# Altium PCB SSRT Tronics.PcbDoc
Units mm, origin at the board's own origin, x right, y up, seen from the top; angles counter-clockwise.
Board outline 69.85 x 55.63 mm, 2 copper layers (Top Layer, Bottom Layer); 11 components, 13 nets, 60 pads, 1 vias.
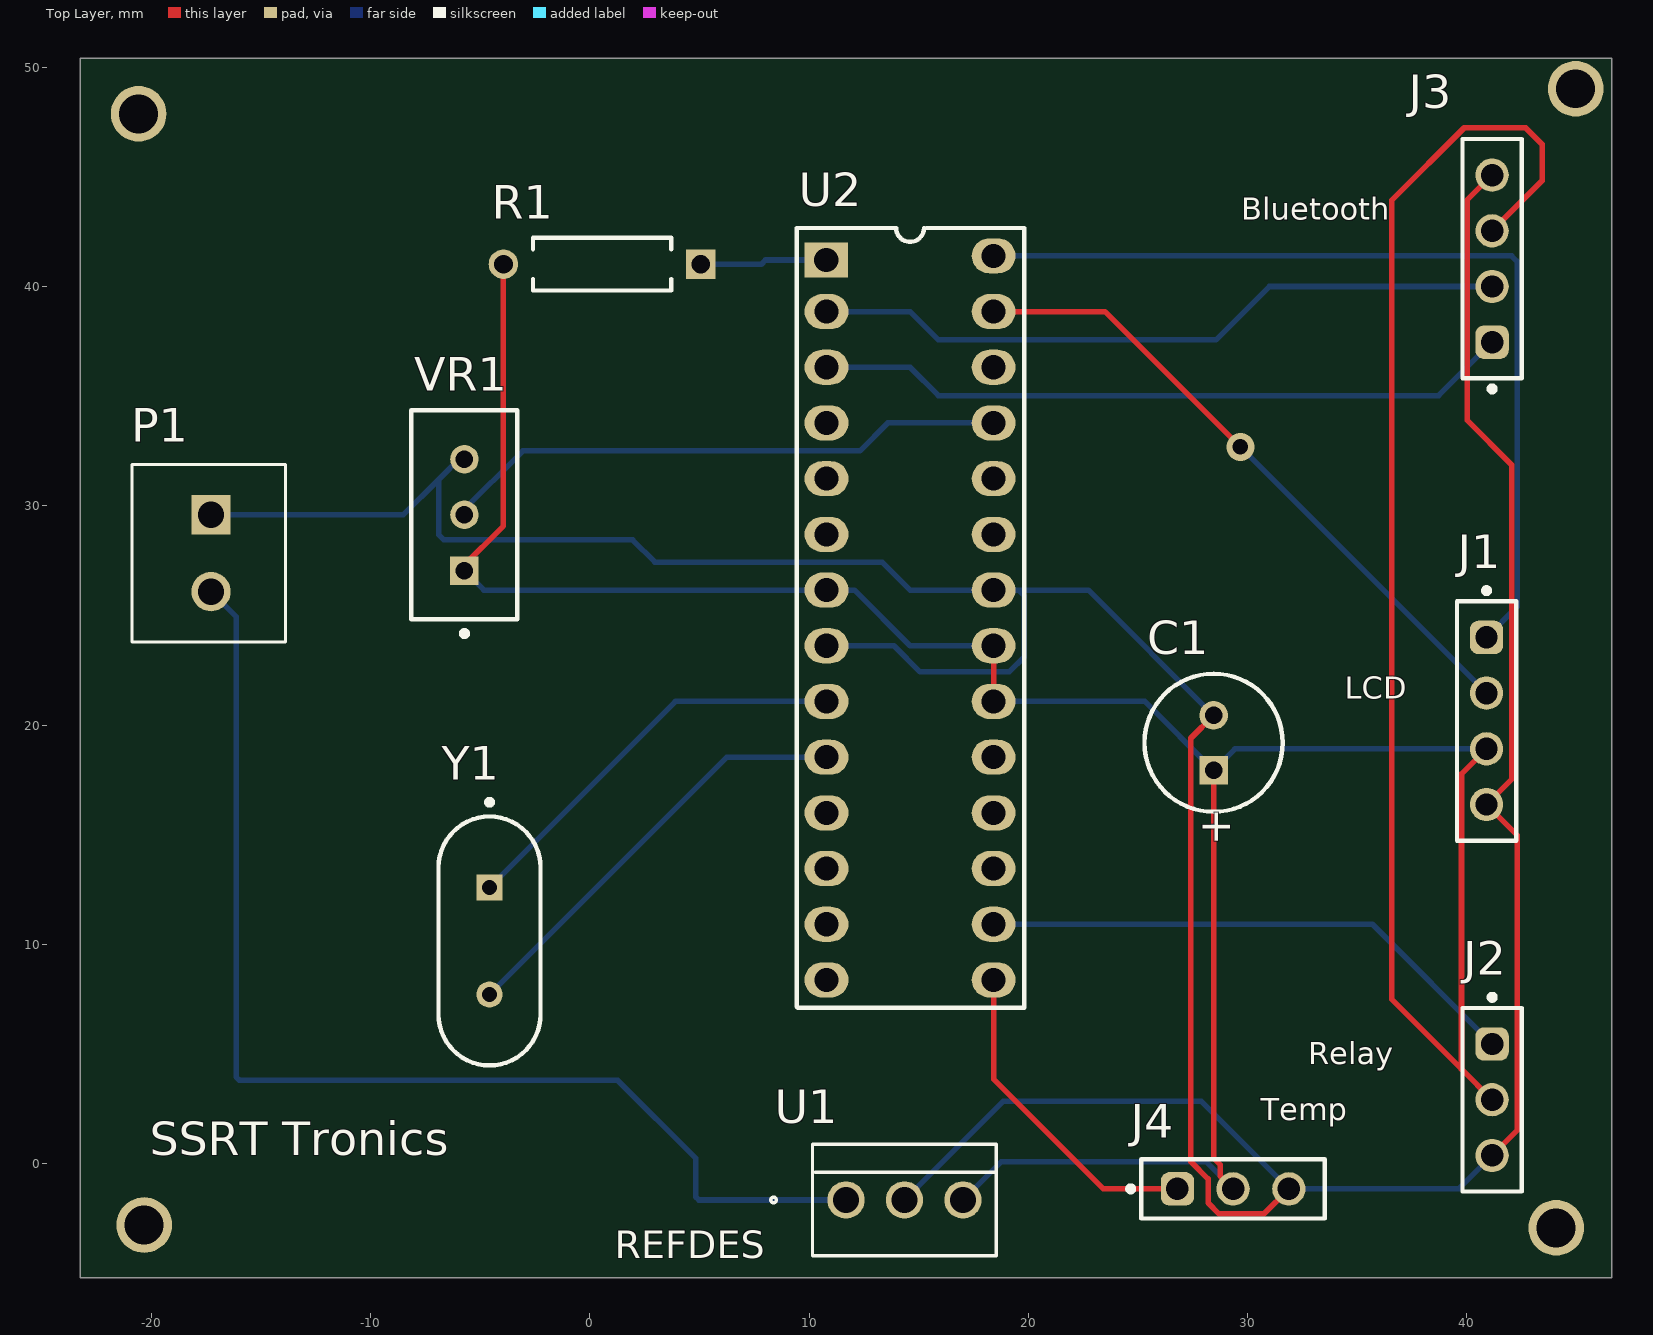
[diagram p0: Top Layer view]
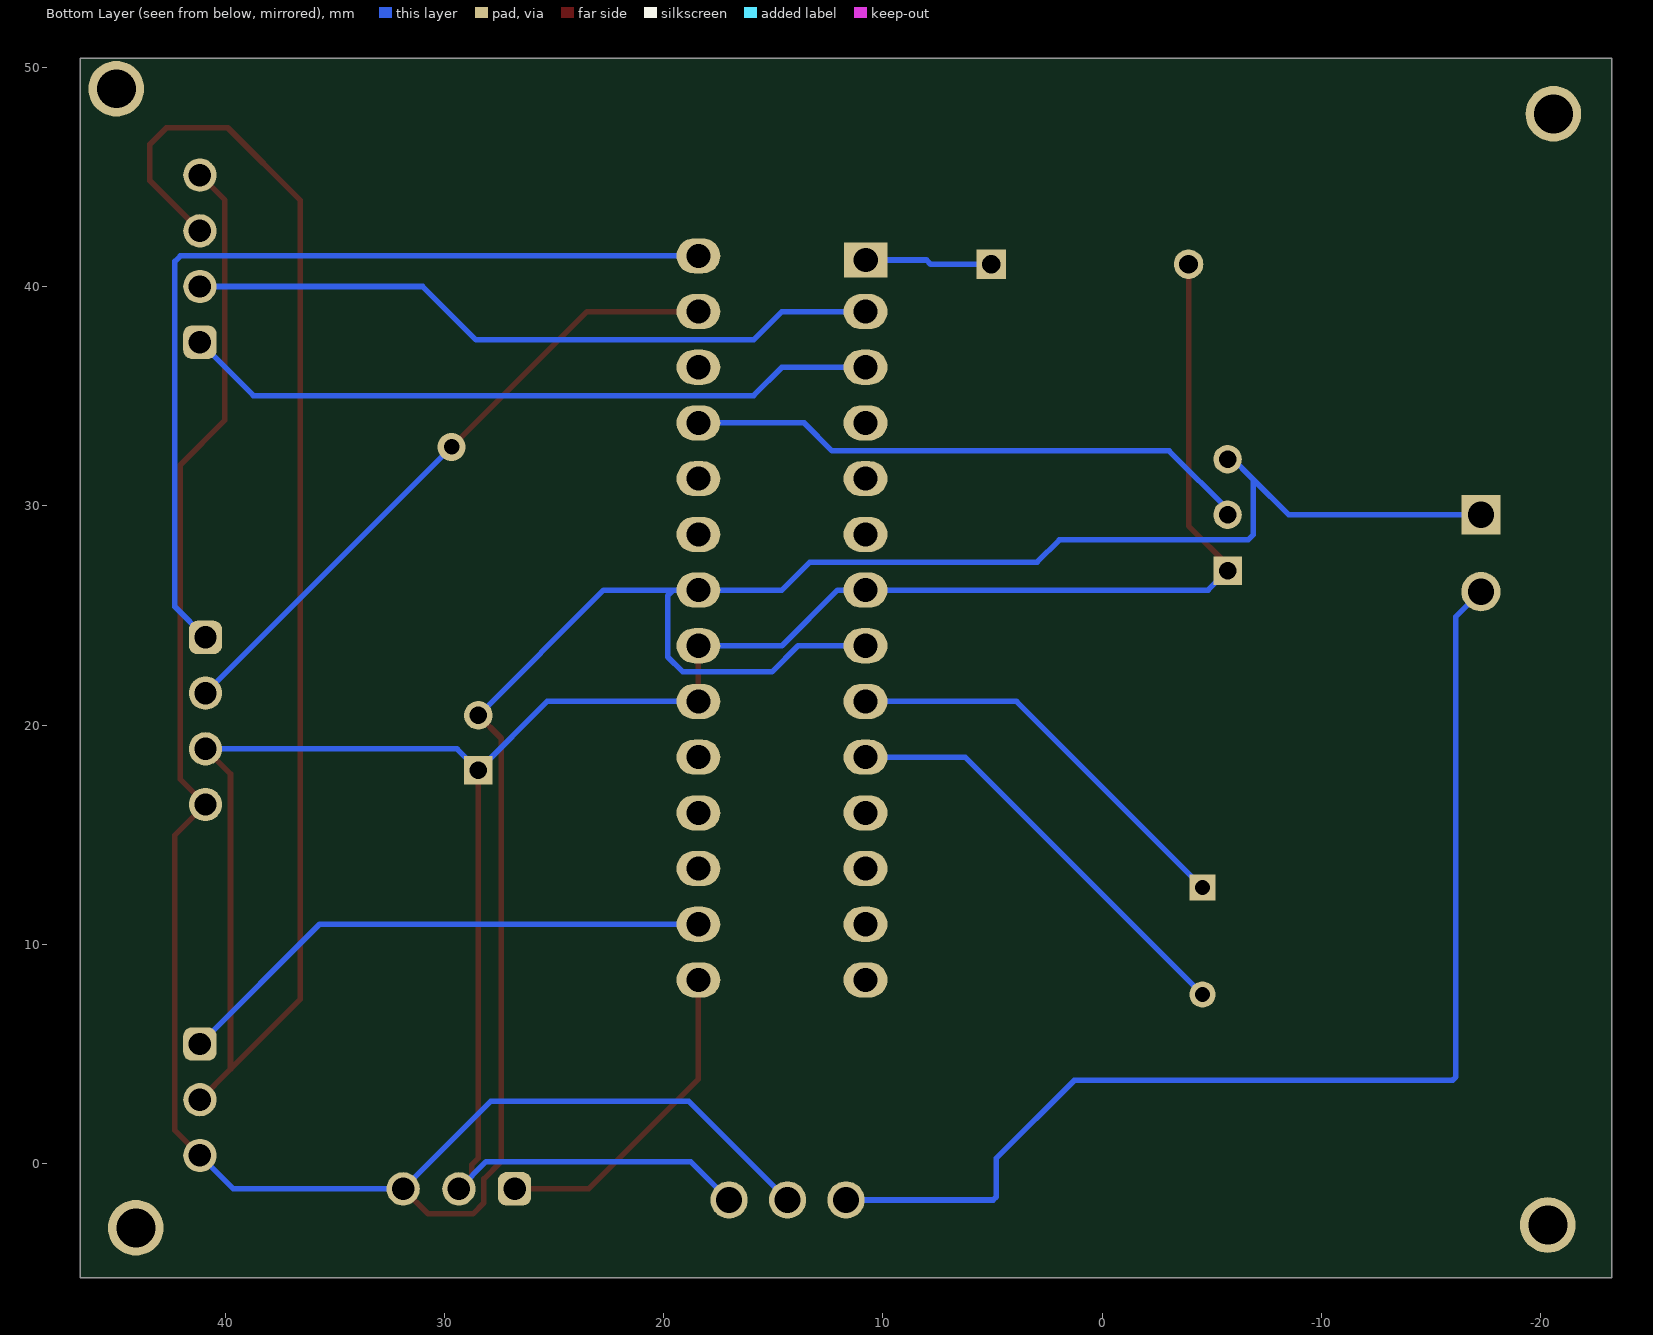
[diagram p1: Bottom Layer view, seen from below]
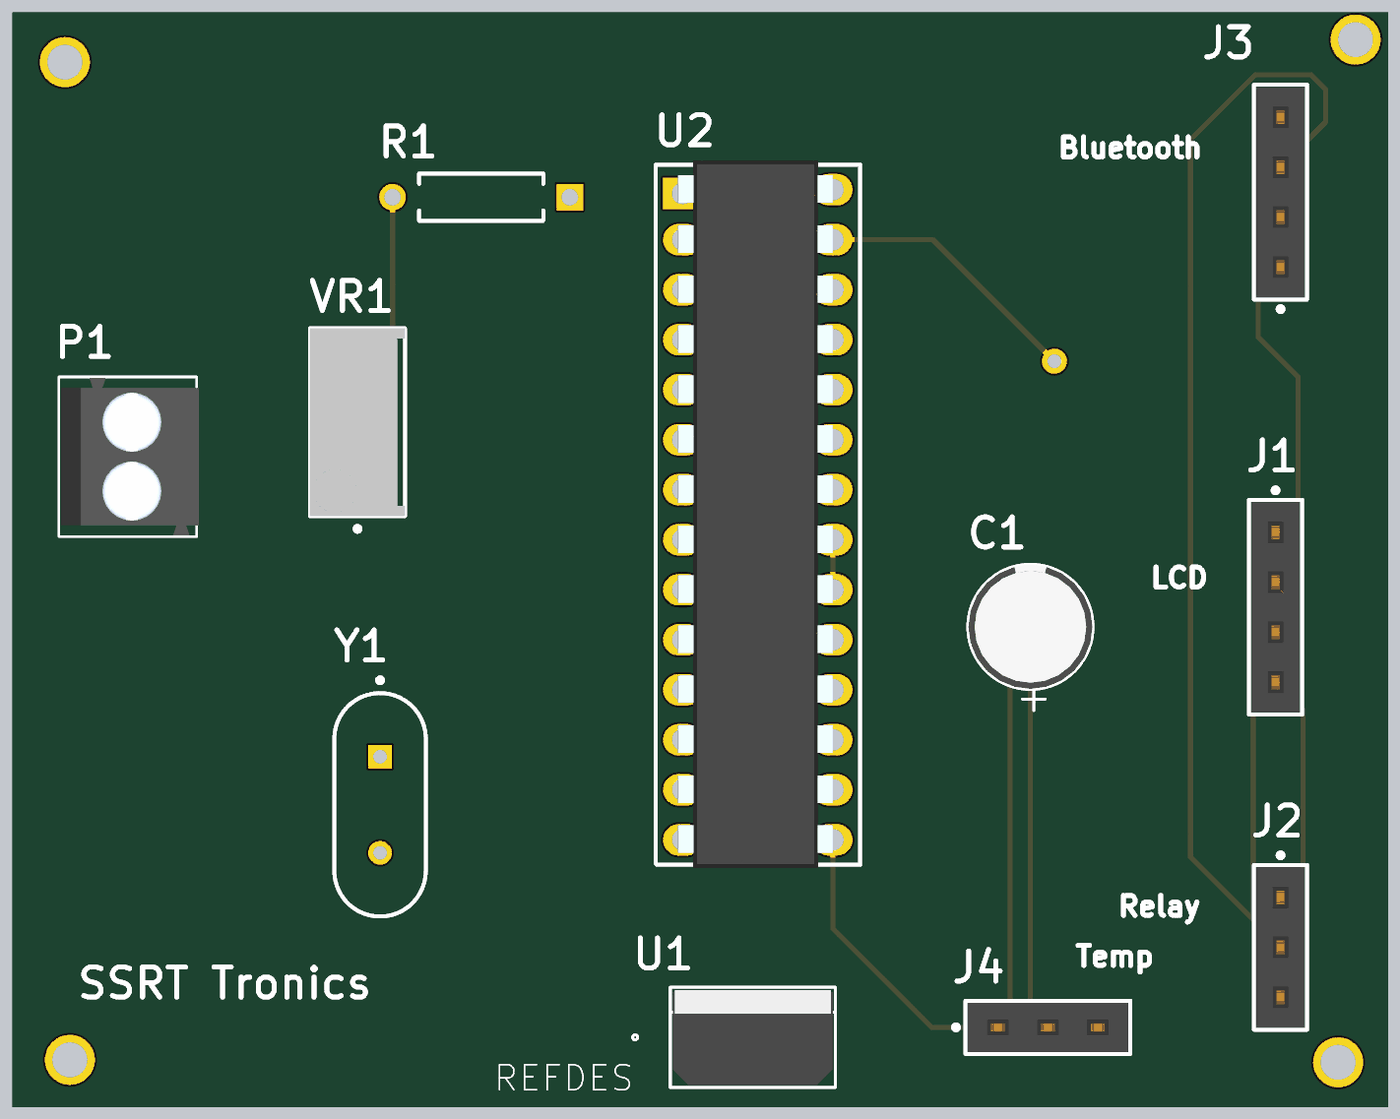
[diagram p2: 3D render of the assembled board from above, using the file's embedded part models]

## Layer stack, top to bottom
Top Solder: solder mask 0.0102, Solder Resist, Dk 3.5
Top Layer: signal copper 0.0356
Dielectric 1: dielectric 0.32, FR-4, Dk 4.8
Bottom Layer: signal copper 0.0356
Bottom Solder: solder mask 0.0102, Solder Resist, Dk 3.5

## Board outline
-23.241,-5.207 46.609,-5.207 46.609,50.419 -23.241,50.419

## Design rules (kind name [scope] priority, off if disabled: settings)
Clearance [All] p1: gap=0.254 ignorepadtopadclearanceinfootprint=FALSE
PolygonConnect [All] p1: connectstyle=Relief reliefconductorwidth=0.254 reliefentries=4 polygonreliefangle="90 Angle" airgapwidth=0.254
RoutingVias [All] p1: holewidth=0.711 width=1.27 viastyle="Through Hole" minholewidth=0.711 minwidth=1.27 maxholewidth=0.711 maxwidth=1.27
SolderMaskExpansion [All] p1: expansion=0.102 istentingtop=FALSE
SupplyNets "Schematic Supply Nets_2" [InNet('+5')] p1: voltage=0.000
SupplyNets "Schematic Supply Nets_1" [InNet('VCC')] p2: voltage=0.000
SupplyNets "Schematic Supply Nets" [InNet('GND')] p3: voltage=0.000
Width [All] p1: maxlimit=0.254 minlimit=0.254 preferedwidth=0.254
30 further rules are at their usual default settings.

## Components (designator, comment, footprint, x,y, rotation, side; value= is the part's Value field where it differs from the comment)
C1 "ECA-1HM470" CAPPR55-250-1120X630X1220 28.448,19.197 r90 top value=47µF
J1 "61300411821" 61300411821 40.894,20.193 r270 top
J2 "61300311821" 61300311821 41.148,2.921 r270 top
J3 "61300411821" 61300411821 41.148,41.275 r90 top
J4 "61300311821" 61300311821 29.337,-1.143 r0 top
P1 "OSTTE020104" OST_OSTTE020104 -17.272,27.841 r270 top
R1 "MFR-25FBF52-10K" RESA60-630X240 0.563,41.021 r180 top value=10k
U1 "LM7805CTNOPB" NDE3_TEX 11.684,-1.651 r0 top
U2 "ATMEGA328P-PU" 27_DIP_7.62mm 10.785,41.212 r0 top
VR1 "3296W-1-103LF" BOUR-3296W -5.715,29.591 r90 top
Y1 "FOXSLF/160-20" FOX-FOXSLF160-20 -4.572,10.16 r270 top

## Footprints (in the part's own frame and the unit in brackets; to place one, negate y for a bottom-side part, rotate by r counter-clockwise, add the part's x,y. Pads: shape width x height; smd on the part's side, far side on the other; paste and mask are expansions set on the pad)
27_DIP_7.62mm [mm]
  rect 2x1.6 hole 1.1: 1(0,0)
  oval 2x1.6 hole 1.1: 2(0.01,-2.35) 3(0.01,-4.89) 4(0.01,-7.43) 5(0.01,-9.97) 6(0.01,-12.51) 7(0.01,-15.05) 8(0.01,-17.59) 9(0.01,-20.13) 10(0.01,-22.67) 11(0.01,-25.21) 12(0.01,-27.75) 13(0.01,-30.29) 14(0.01,-32.83) 15(7.63,-32.83) 16(7.63,-30.29) 17(7.63,-27.75) 18(7.63,-25.21) 19(7.63,-22.67) 20(7.63,-20.13) 21(7.63,-17.59) 22(7.63,-15.05) 23(7.63,-12.51) 24(7.63,-9.97) 25(7.63,-7.43) 26(7.63,-4.89) 27(7.63,-2.35) 28(7.63,0.19)
  silkscreen extent -1.35,-34.1 9.02,1.46, body extent -0.23,-34.26 7.65,1.68, height 4.65
61300311821 [mm] "Socket Header, Pitch 2.54 mm, THT, Vertical, single row, 3p"
  rrect50% 1.52x1.52 hole 1.02: 1(-2.54,0)
  round 1.52 hole 1.02: 2(0,0) 3(2.54,0)
  silkscreen extent -4.79,-1.35 4.19,1.35, body extent -4.06,-1.25 4.06,1.25, height 8.55
61300411821 [mm] "Socket Header, Pitch 2.54 mm, THT, Vertical, single row, 4p"
  rrect50% 1.52x1.52 hole 1.02: 1(-3.81,0)
  round 1.52 hole 1.02: 2(-1.27,0) 3(1.27,0) 4(3.81,0)
  silkscreen extent -6.06,-1.35 5.46,1.35, body extent -5.33,-1.25 5.33,1.25, height 8.55
BOUR-3296W [mm] "THD, 3-Leads, Body 9.53x4.83mm, Pitch 2.54mm"
  rect 1.3x1.3 hole 0.8: 1(-2.54,0)
  round 1.3 hole 0.8: 2(0,0) 3(2.54,0)
  silkscreen extent -5.54,-2.41 4.76,2.42, body extent -4.76,-2.4 4.76,2.42, height 11.55
CAPPR55-250-1120X630X1220 [mm] "THD, 2-Leads, Dia 6.3mm, Pin Spacing 2.5mm"
  rect 1.3x1.3 hole 0.8: 1(-1.25,0)
  round 1.3 hole 0.8: 2(1.25,0)
  silkscreen extent -3.15,-3.15 3.15,3.15, body extent -3.15,-3.15 3.16,3.15, height 12.21
FOX-FOXSLF160-20 [mm] "THD, 2-Leads, Body 11.35x4.65mm"
  rect 1.2x1.2 hole 0.7: 1(-2.44,0)
  round 1.2 hole 0.7: 2(2.44,0)
  silkscreen extent -6.45,-2.33 5.67,2.33, body extent -5.68,-2.33 5.68,2.33, height 3.6
NDE3_TEX [mil]
  round 67 / inner round 60 / far side round 67 hole 47 paste-99999 mask+0: 1(0,0) 2(105,0) 3(210,0)
  silkscreen extent -135,-100 270,100, body extent -55,-95 265,95, height 420
OST_OSTTE020104 [mm]
  rect 1.8x1.8 / inner round 1.8 / far side rect 1.8x1.8 hole 1.2: 1(-1.75,0)
  round 1.8 hole 1.2: 2(1.75,0)
  silkscreen extent -4.05,-3.6 4.05,3.4, body extent -4,-3.5 4,3.5, height 8.4
RESA60-630X240 [mm] "Axial Resistor, 2-Leads, Dia 2.4mm, Body Length 6.3mm"
  rect 1.35x1.35 hole 0.85: 1(-4.5,0)
  round 1.35 hole 0.85: 2(4.5,0)
  silkscreen extent -3.15,-1.2 3.15,1.2, body extent -4.77,-1.19 4.77,1.2, height 2.4

## Part data
C1: library part CMP-001-00031-7, "Aluminum Electrolytic Capacitor, 47 uF, +/-20%, 50 V, -40 to 85 degC, 2-Pin THD, RoHS, Bulk", Capacitor Type=Electrolytic, Case/Package=Radial, Manufacturer=Panasonic, Max Operating Temperature=85°C, Min Operating Temperature=-40°C, Package Description="2-Pin Radial Lead, Dia 6.3 mm, Height 12.2 mm", Package Quantity=200, Package Reference=CAPPR55-250-1120X630X1220, Ripple Current=130mA, Tolerance=20%, Voltage Rating=50V, Datasheet URL=https://industrial.panasonic.com/cdbs/www-data/pdf/RDF0000/DMF0000COL72.pdf, Datasheet Version=Apr-16, Diameter=6.3mm, Lead Pitch=2.5mm, Manufacturer URL=http://www.panasonic.com/, Mounting Technology=TH, Packaging=Bulk, Pins=2, Ripple Current (AC)=130mA, RoHS Compliant=True
J1 J3: "WR-PHD Socket Header, THT, Vertical, pitch 2.54mm, 1 Row, 4P", Contact Resistance=20mOhm, Manufacturer="Wurth Elektronik", Operating Temperature Max=125°C, Operating Temperature Min=-40°C, Rated Current=3A, Withstanding Voltage=500V, Working Voltage=250V, Category="Board-to-Board Connectors", ComponentLink1Description="Website Link", ComponentLink1URL=https://www.we-online.com/redexpert/article/61300411821?ad, ComponentLink2Description="Datasheet Link", ComponentLink2URL=https://www.we-online.com/redexpert/spec/61300411821?ad, Gender="Socket Header", Manufacturer Part Number=61300411821, Match Code=WR-PHD, Mount="Through Hole", Number of Pins=4, Number of Rows=1, Orientation=Vertical, Packaging=Tray, Pitch=2.54mm
J2 J4: "WR-PHD Socket Header, THT, Vertical, pitch 2.54mm, 1 Row, 3P", Contact Resistance=20mOhm, Manufacturer="Wurth Elektronik", Operating Temperature Max=125°C, Operating Temperature Min=-40°C, Rated Current=3A, Withstanding Voltage=500V, Working Voltage=250V, Category="Board-to-Board Connectors", ComponentLink1Description="Website Link", ComponentLink1URL=https://www.we-online.com/redexpert/article/61300311821?ad, ComponentLink2Description="Datasheet Link", ComponentLink2URL=https://www.we-online.com/redexpert/spec/61300311821?ad, Gender="Socket Header", Manufacturer Part Number=61300311821, Match Code=WR-PHD, Mount="Through Hole", Number of Pins=3, Number of Rows=1, Orientation=Vertical, Packaging=Tray, Pitch=2.54mm
P1: "2 Position Wire to Board Terminal Block Horizontal with Board 0.138 (3.50mm) Through Hole", Package=None, Check_prices=https://www.snapeda.com/parts/OSTTE020104/ON/view-part/?ref=eda, MF="On Shore", MP=OSTTE020104, SnapEDA_Link=https://www.snapeda.com/parts/OSTTE020104/ON/view-part/?ref=snap
R1: library part CMP-009-00047-4, "Axial Resistor, 10 KOhm, +/- 1%, 0.25 W, -55 to 155 degC, 2-Pin THD, RoHS, Bulk", Case/Package=Axial, Manufacturer=Yageo, Max Operating Temperature=155°C, Min Operating Temperature=-55°C, Package Description="2-Pin Axial Lead, Dia 2.4 mm, Body Length 6.3 mm", Package Quantity=200, Package Reference=MFR-25, Power=250mW, Tolerance=1%, Voltage Rating=250V, Datasheet URL=http://www.yageo.com/documents/recent/Yageo%20LR_MFR_2013.pdf, Datasheet Version=Apr-13, Manufacturer URL=http://www.yageo.com/, Mounting Technology=TH, Packaging=Bulk, RoHS Compliant=True
U1: "No Description Available", Mfr_Name="Texas Instruments", RefDes=RefDes, Type=Type
U2: "ATMEGA328P-PU; 8 bit Microcontroller AVR 20MHz 1; 32kb Flash; 2kb RAM; I2C SPI 2", Case/Package=PDIP, Frequency=20MHz, Manufacturer="Microchip / Atmel", Max Operating Temperature=85°C, Max Supply Voltage=5.5V, Min Operating Temperature=-40°C, Min Supply Voltage=1.8V, Package Quantity=14, Supplier Part Number 1=ATMEGA328P-PU-ND, Category=Microcontrollers, ComponentLink1Description=https://datasheet.ciiva.com/20168/73-4283-20168380.pdf?src-supplier=Rapid+Electronics, ComponentLink1URL=https://datasheet.ciiva.com/20168/73-4283-20168380.pdf?src-supplier=Rapid+Electronics, ComponentLink2Description=https://datasheet.ciiva.com/19457/2139111-19457070.pdf?src-supplier=Jameco, ComponentLink2URL=https://datasheet.ciiva.com/19457/2139111-19457070.pdf?src-supplier=Jameco, ComponentLink3Description=https://datasheet.ciiva.com/1157/1684409-1157696.pdf?src-supplier=Element14, ComponentLink3URL=https://datasheet.ciiva.com/1157/1684409-1157696.pdf?src-supplier=Element14, ComponentLink4Description=https://datasheet.ciiva.com/26818/atmega328p-pu-26818578.pdf?src-supplier=IIIC, ComponentLink4URL=https://datasheet.ciiva.com/26818/atmega328p-pu-26818578.pdf?src-supplier=IIIC, ComponentLink5Description=https://datasheet.ciiva.com/29119/155197-da-01-en-microcontr-atmega328p-pu-8bit-pdip-28-29119593.pdf?src-supplier=Conrad, ComponentLink5URL=https://datasheet.ciiva.com/29119/155197-da-01-en-microcontr-atmega328p-pu-8bit-pdip-28-29119593.pdf?src-supplier=Conrad, ComponentLink6Description=https://datasheet.ciiva.com/15213/getdatasheetpartid-318533-15213133.pdf?src-supplier=Verical, ComponentLink6URL=https://datasheet.ciiva.com/15213/getdatasheetpartid-318533-15213133.pdf?src-supplier=Verical, Contact Plating=Tin,Matte, Core Architecture=AVR, Data Bus Width=8b, Height=3.28mm, Interface=I2C,SPI,UART,USART,2-Wire, Lead Free="Lead Free", Length=37.4mm, Manufacturer Part Number=ATMEGA328P-PU, Max Frequency=20MHz, Memory Size=32KB, Memory Type=FLASH, Mount="Through Hole", Number of ADC Channels=6, Number of I2C Channels=1, Number of I/Os=23, Number of Pins=28, Number of Programmable I/O=23, Number of PWM Channels=6, Number of SPI Channels=1, Number of Timers/Counters=3, Oscillator Type=Internal, Packaging=Rail/Tube, Peripherals="Brown-out Detect/Reset,POR,PWM,WDT", Pricing 1="1=2,08000, 25=1,91000, 100=1,73000 (USD)", Radiation Hardening=No, RAM Size=2KB, REACH SVHC="No SVHC", RoHS=Yes, Stock 1=5280, Supplier 1=Digi-Key, Watchdog Timer=Yes, Width=6.76mm
VR1: library part CMP-009-00038-2, "Square Trimpot(R) Trimming Potentiometer, 10 KOhm, +/- 10%, 0.5 W, -55 to 125 degC, 3-Pin THD, RoHS, Tube", Case/Package=3296W, Manufacturer=Bourns, Max Operating Temperature=150°C, Min Operating Temperature=-55°C, Package Description="3-Pin Through Hole Device, Body 9.53 x 4.83 mm, Pitch 2.54 mm", Package Quantity=50, Power=500mW, Resistance=10k, Tolerance=10%, Voltage Rating=300V, Datasheet URL=http://www.bourns.com/docs/Product-Datasheets/3296.pdf, Datasheet Version=May-16, Manufacturer URL=http://www.bourns.com/, Mounting Technology=TH, Package Reference=3296W, Packaging=Rail/Tube, RoHS Compliant=True
Y1: library part CMP-003-00027-2, "Resistance Weld Thru-Hole Crystal, 16 MHz, +/- 30 ppm, 20 pF, -20 to 70 degC, 2-Pin THD, RoHS, Bulk", Case/Package=FOXSLF160-20, Frequency=16MHz, Frequency Tolerance=30ppm, Load Capacitance=20pF, Manufacturer="FOX Electronics", Max Operating Temperature=70°C, Min Operating Temperature=-20°C, Package Description="2-Pin Through Hole Device, Body 11.35 x 4.65 mm", Package Quantity=100, Resistance=40Ohm, Tolerance=50ppm, Datasheet URL=http://www.foxonline.com/pdfs/hc49slf.pdf, Datasheet Version=Mar-15, ESR=40, Manufacturer URL=http://www.foxonline.com/, Mounting Technology=TH, Package Reference=FOXSLF160-20, Packaging=Bulk, Pins=2, RoHS Compliant=True

## Free pads (board coordinates)
  round 2.54 hole 1.778: 2(-20.32,-2.794) 3(-20.574,47.879) 5(44.069,-2.921) 6(44.958,49.022)

## Via types
v1: diameter 1.27, hole 0.711, Top Layer to Bottom Layer, 1 vias

## Nets (pads, with @x,y where several pads share a name; then routed paths per layer and width w, separated by ;. In a path a pad name is that pad's centre, name@x,y a point inside that pad or via, vN(x,y) a via of type N, cw(c..) or ccw(c..) an arc to the next point about the centre after c; other vN are vias at no path point)
+5: C1.1 J1.3 J2.2 J3.3 J4.2 R1.2 U1.3 U2.7 U2.20 U2.21 VR1.1 | length 171.5
  Top Layer w0.254: VR1.1@-5.842,27.178 -3.937,29.083 R1.2 ; U2.20 U2.21 ; C1.1 28.448,0.254 28.742,-0.04 28.742,-0.548 J4.2 ; J1.3 39.751,17.78 39.751,4.318 ; J2.2 39.751,4.318 ; J3.3 43.434,44.831 43.434,46.482 42.672,47.244 39.878,47.244 36.576,43.942 36.576,7.493 39.751,4.318
  Bottom Layer w0.254: VR1.1@-5.842,27.178 VR1.1 -4.826,26.162 U2.7 12.065,26.162 14.605,23.622 U2.21 ; U1.3 18.771,0.102 28.092,0.102 J4.2 ; U2.20 25.313,21.082 C1.1 29.424,18.923 J1.3
GND: C1.2 J1.4 J2.3 J3.4 J4.3 P1.1 U1.2 U2.8 U2.22 VR1.3 | length 172.6
  Top Layer w0.254: C1.2 27.407,19.406 27.407,0.102 28.194,-0.686 28.194,-1.778 28.702,-2.286 30.734,-2.286 J4.3 ; J2.3 42.291,1.524 42.291,14.986 J1.4 42.037,17.526 42.037,31.877 40.005,33.909 40.005,43.942 J3.4
  Bottom Layer w0.254: P1.1 -8.509,29.591 -6.883,31.217 ; VR1.3@-5.842,32.258 -6.883,31.217 ; U2.8 13.868,23.622 15.062,22.428 19.126,22.428 19.812,23.114 19.812,25.908 19.558,26.162 ; U1.2 18.847,2.845 27.889,2.845 J4.3 39.624,-1.143 J2.3 ; C1.2 22.733,26.162 19.558,26.162 ; -6.883,31.217 -6.883,28.677 -6.655,28.448 1.956,28.448 2.972,27.432 13.335,27.432 14.605,26.162 U2.22 19.558,26.162
NetJ1_1: J1.1 U2.28 | length 41.7
  Bottom Layer w0.254: U2.28 42.037,41.402 42.291,41.148 42.291,25.4 J1.1
NetJ1_2: J1.2 U2.27 | length 29.7
  Top Layer w0.254: U2.27 23.495,38.862 v1(29.667,32.69)
  Bottom Layer w0.254: v1(29.667,32.69) J1.2
NetJ2_1: J2.1 U2.16 | length 25
  Bottom Layer w0.254: U2.16 35.687,10.922 J2.1
NetJ3_1: J3.1 U2.3 | length 31.9
  Bottom Layer w0.254: U2.3 14.605,36.322 15.9,35.027 38.71,35.027 J3.1
NetJ3_2: J3.2 U2.2 | length 31.9
  Bottom Layer w0.254: U2.2 14.605,38.862 15.9,37.567 28.55,37.567 30.988,40.005 J3.2
NetJ4_1: J4.1 U2.15 | length 15
  Top Layer w0.254: U2.15 18.415,3.861 23.419,-1.143 J4.1
NetR1_1: R1.1 U2.1 | length 5.8
  Bottom Layer w0.254: R1.1 7.823,41.021 8.014,41.212 U2.1
NetU2_9: U2.9 Y1.1 | length 18.9
  Bottom Layer w0.254: Y1.1 3.91,21.082 U2.9
NetU2_10: U2.10 Y1.2 | length 19.8
  Bottom Layer w0.254: Y1.2 6.25,18.542 U2.10
NetU2_25: U2.25 VR1.2 | length 25.9
  Bottom Layer w0.254: VR1.2@-5.842,29.718 -3.048,32.512 12.319,32.512 13.589,33.782 U2.25
VCC: P1.2 U1.1 | length 53.8
  Bottom Layer w0.254: P1.2 -16.129,24.948 -16.129,3.959 -15.98,3.81 1.27,3.81 4.826,0.254 4.826,-1.502 4.975,-1.651 U1.1
pads on no net: U2.4 U2.5 U2.6 U2.11 U2.12 U2.13 U2.14 U2.17 U2.18 U2.19 U2.23 U2.24 U2.26

## Silkscreen, mask and mechanical layers (free items; w line width, h text height)
Top Overlay:
  text "Bluetooth" at 29.718,43.053 h1.02
  text "LCD" at 34.417,21.209 h1.02
  text "Relay" at 32.766,4.53 h1.02
  text "Temp" at 30.607,1.99 h1.02
  text "SSRT Tronics" at -20.066,0.381 h1.52

## Text inside footprints (layer, text, board x,y; h text height)
C1: Top Overlay "+" at 29.198,14.497 h1.5 r90
U1: Top Overlay "REFDES" at 1.143,-4.318 h1.27; Mechanical 13 "TAB" at 13.875,-0.191 h0.64; Mechanical 13 "RefDes2" at 10.795,-3.81 h1.27